# Altium PCB PCB1.PcbDoc
Units mil, origin at the board's own origin, x right, y up, seen from the top; angles counter-clockwise.
Board outline 3000.03 x 3779.56 mil, 2 copper layers (Top Layer, Bottom Layer); 116 components, 91 nets, 489 pads, 37 vias.
Unrouted connection lines stored in the file: 176.
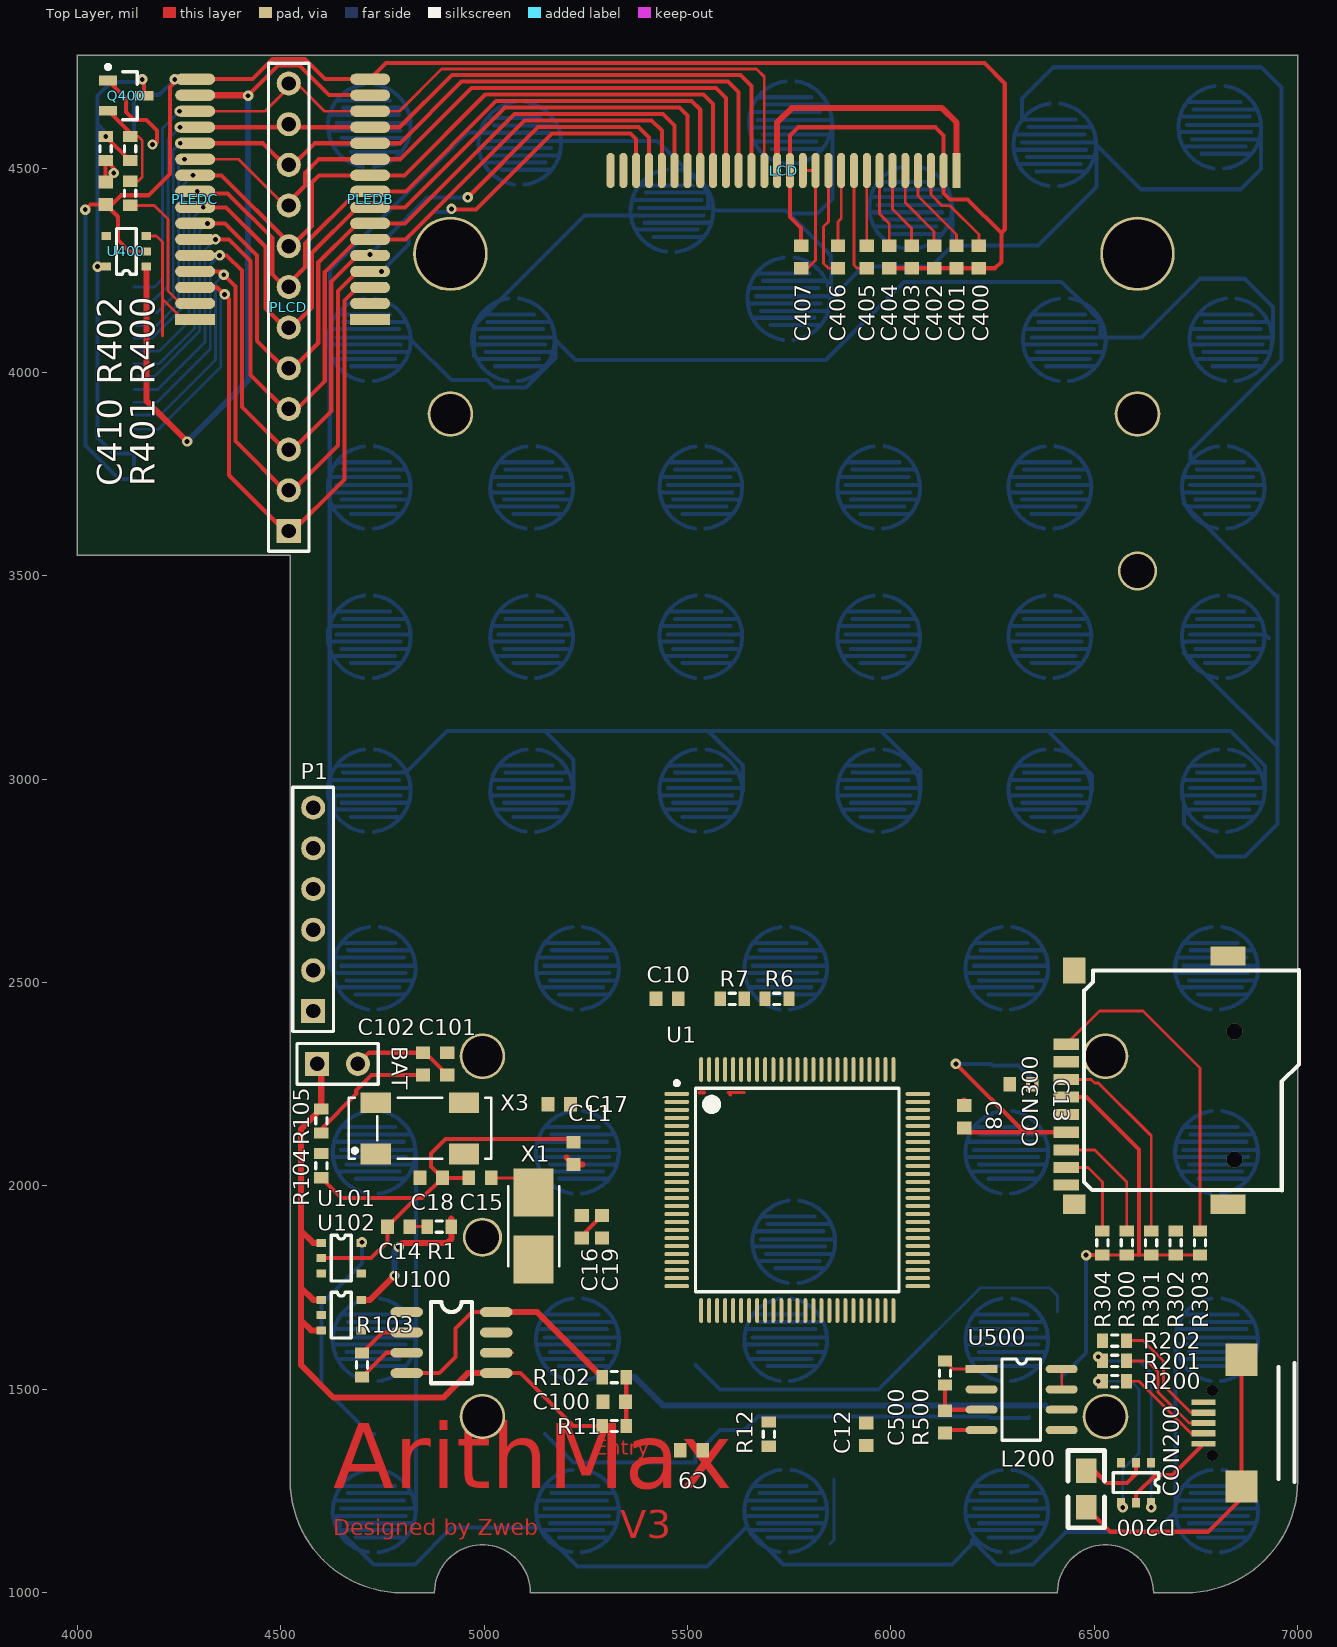
[diagram p0: Top Layer view]
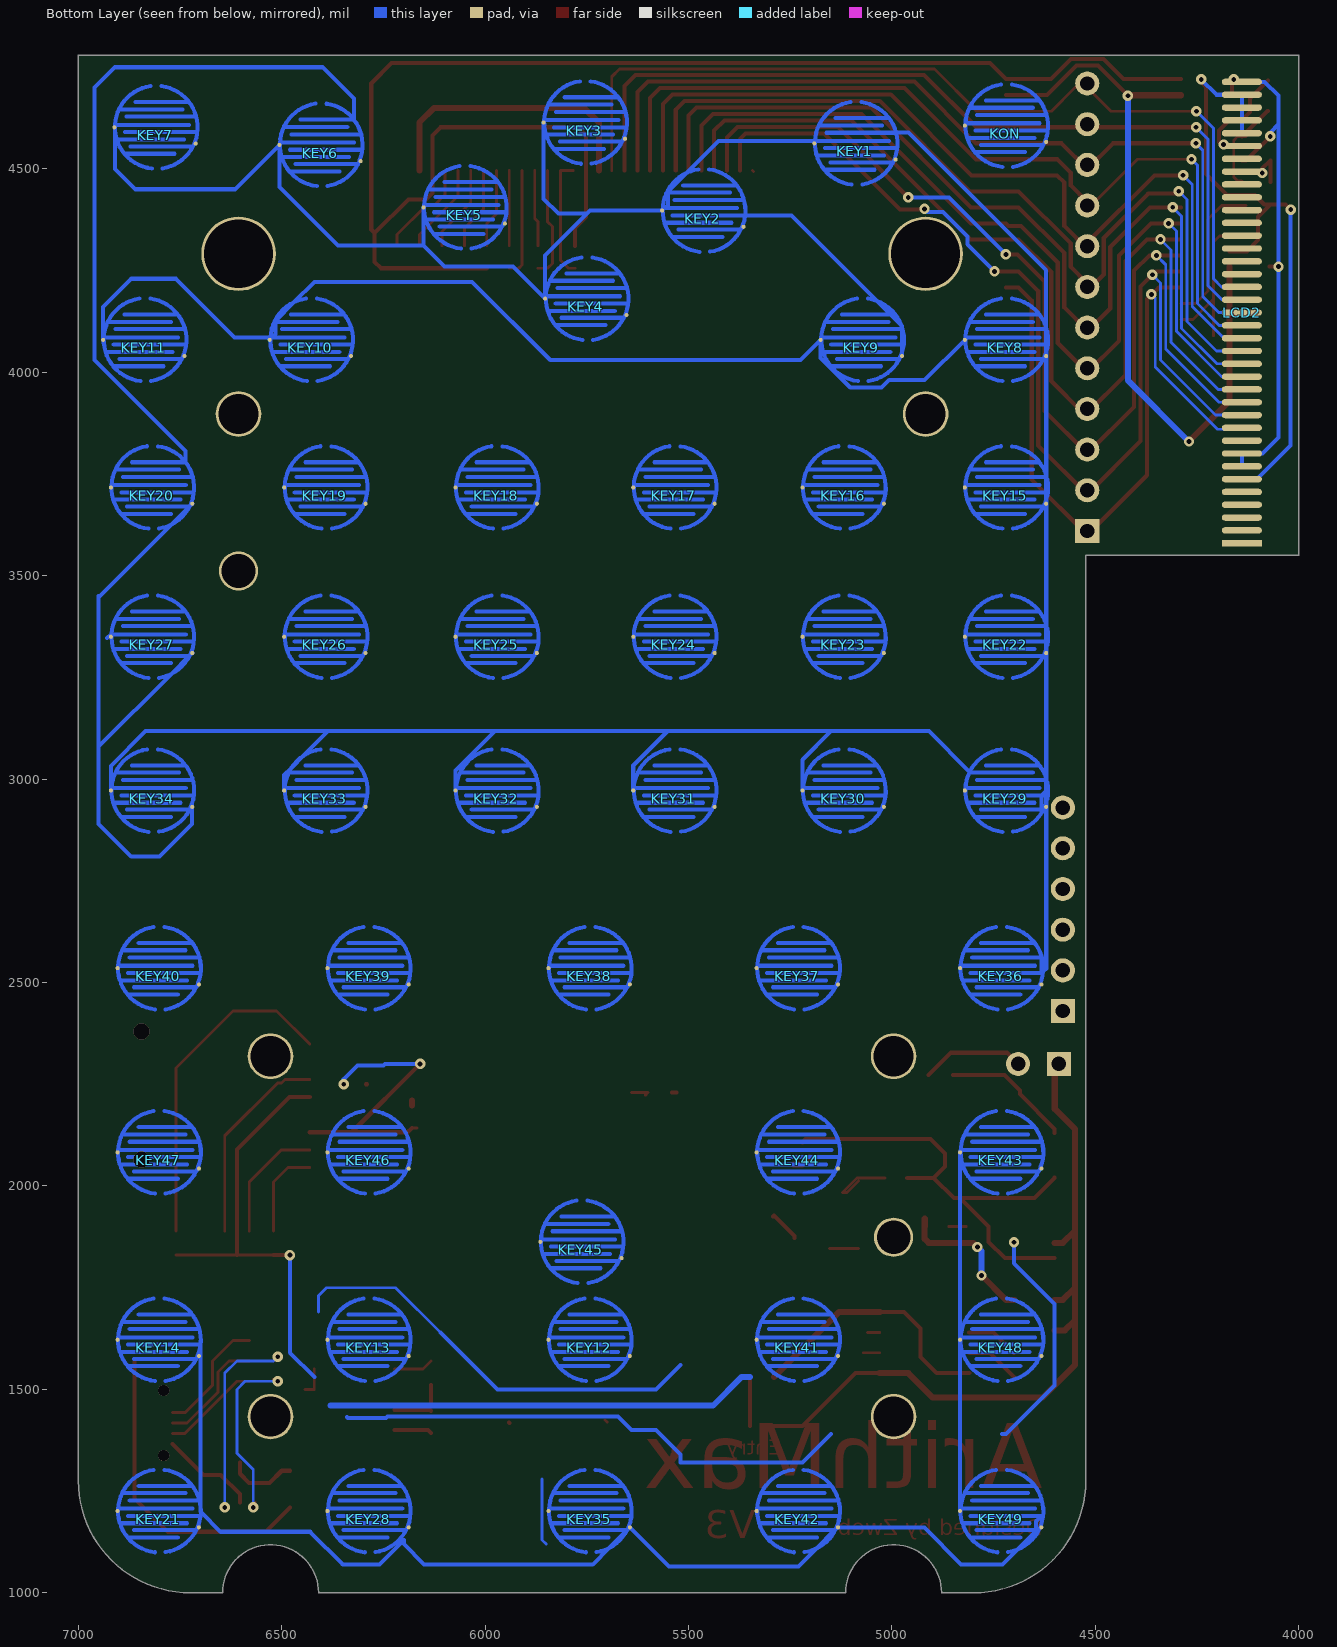
[diagram p1: Bottom Layer view, seen from below]

## Layer stack, top to bottom
Top Layer: signal copper 1.4
Dielectric: dielectric 12.6, FR-4, Dk 4.8
Bottom Layer: signal copper 1.4

## Board outline
4000,3549.99 4523.61,3549.99 4523.61,1275.59 ccw(c4799.21,1275.59) 4799.21,999.99 4877.95,999.99 ccw(c4877.95,1000) 4877.97,1000 cw(c4996.06,1000) 5114.16,1000 ccw(c5114.17,1000) 5114.17,999.99 6409.45,999.99 ccw(c6409.45,1000) 6409.46,1000 cw(c6527.56,1000) 6645.65,1000 ccw(c6645.67,1000) 6645.67,999.99 6724.41,999.99 ccw(c6724.41,1275.59) 7000.02,1275.59 7000.02,4779.53 ccw(c7000,4779.53) 7000,4779.54 4000,4779.54 ccw(c4000,4779.53) 3999.99,4779.53 3999.99,3550 ccw(c4000,3550)

## Design rules (kind name [scope] priority, off if disabled: settings)
Clearance [All] p1: gap=6
HoleSize [All] p1: absolutevalues=TRUE maxlimit=250 minlimit=11.81 maxpercent=80.000 minpercent=20.000
MinimumSolderMaskSliver [All] p1 off: minsoldermaskwidth=10
NetAntennae [All] p1 off: netantennaetolerance=0
PolygonConnect [All] p1: connectstyle=Relief reliefconductorwidth=10 reliefentries=4 polygonreliefangle="90 Angle"
RoutingVias [All] p1: holewidth=11.81 width=25.59 viastyle="Through Hole" minholewidth=11.81 minwidth=25.59 maxholewidth=11.81 maxwidth=25.59
SilkscreenOverComponentPads [All] p1: minsilkscreentomaskgap=10
SolderMaskExpansion [All] p1: expansion=4
Width [All] p1: maxlimit=20 minlimit=6 preferedwidth=7
24 further rules are at their usual default settings.

## Components (designator, comment, footprint, x,y, rotation, side; value= is the part's Value field where it differs from the comment)
BAT "Header 2" HDR1X2 4590,2300 r0 top
C8 "104" 1608[0603] 6180,2170 r270 top
C9 "104" 1608[0603] 5510,1350 r180 top
C10 "104" 1608[0603] 5450,2460 r0 top
C11 "104" 1608[0603] 5220,2080 r90 top
C12 "2.2uF" 1608[0603] 5940,1390 r270 top
C13 "2.2uF" 1608[0603] 6320,2250 r0 top
C14 "104" 1608[0603] 4790,1900 r0 top
C15 "22pF" 1608[0603] 4990,2020 r180 top
C16 "22pF" 1608[0603] 5240,1900 r270 top
C17 "12pF" 1608[0603] 5185.04,2200.79 r180 top
C18 "12pF" 1608[0603] 4870,2020 r0 top
C19 "4.7uF" 1608[0603] 5290,1900 r90 top
C100 "105" 1608[0603] 5320,1470 r0 top
C101 "105" 1608[0603] 4910,2300 r90 top
C102 "0.1uF" 1608[0603] 4850,2300 r270 top
C400 "2.2uF" 1608[0603] 6216.54,4283.46 r90 top
C401 "2.2uF" 1608[0603] 6161.42,4283.46 r90 top
C402 "2.2uF" 1608[0603] 6106.3,4283.46 r90 top
C403 "2.2uF" 1608[0603] 6051.18,4283.46 r90 top
C404 "2.2uF" 1608[0603] 5996.06,4283.46 r90 top
C405 "2.2uF" 1608[0603] 5940.94,4283.46 r90 top
C406 "0.1uF" 1608[0603] 5870.08,4283.46 r90 top
C407 "0.1uF" 1608[0603] 5779.53,4283.46 r270 top
C410 "104" 1608[0603] 4070,4440 r90 top
C500 "104" 1608[0603] 6133.15,1420 r270 top
CON200 "USB-MINIAB" USB-MICRO 6874.02,1417.32 r90 top
CON300 "TF" TF-2 6630,2260 r0 top
D200 "AZC099-04S" SOT-23-6 6640,1320 r270 top
KEY1 "Button" Button#1 5311.02,4562.99 r180 bottom
KEY2 "Button" Button#2 5685.04,4397.64 r180 bottom
KEY3 "Button" Button#3 5976.38,4614.17 r180 bottom
KEY4 "Button" Button#3 5972.44,4181.1 r180 bottom
KEY5 "Button" Button#3 6271.65,4405.51 r180 bottom
KEY6 "Button" Button#4 6625.98,4559.06 r180 bottom
KEY7 "Button" Button#1 7031.5,4602.36 r180 bottom
KEY8 "Button" Button#5 4941,4080 r180 bottom
KEY9 "Button" Button#6 5295.28,4080 r180 bottom
KEY10 "Button" Button#1 6649.61,4080 r180 bottom
KEY11 "Button" Button#3 7059.06,4080 r180 bottom
KEY12 "Button" Button#3 5964.5,1622 r180 bottom
KEY13 "Button" Button#3 6507.9,1622 r180 bottom
KEY14 "Button" Button#1 7023.6,1622 r180 bottom
KEY15 "Button" Button#5 4941,3717 r180 bottom
KEY16 "Button" Button#3 5340,3717 r180 bottom
KEY17 "Button" Button#3 5756,3717 r180 bottom
KEY18 "Button" Button#3 6193,3717 r180 bottom
KEY19 "Button" Button#4 6614,3717 r180 bottom
KEY20 "Button" Button#2 7040,3717 r180 bottom
KEY21 "Button" Button#1 7023.6,1201 r180 bottom
KEY22 "Button" Button#5 4941,3350 r180 bottom
KEY23 "Button" Button#3 5340,3350 r180 bottom
KEY24 "Button" Button#3 5756,3350 r180 bottom
KEY25 "Button" Button#3 6193,3350 r180 bottom
KEY26 "Button" Button#3 6614,3350 r180 bottom
KEY27 "Button" Button#7 7040,3350 r180 bottom
KEY28 "Button" Button#3 6507.9,1201 r180 bottom
KEY29 "Button" Button#8 4941,2972 r180 bottom
KEY30 "Button" Button#3 5340,2972 r180 bottom
KEY31 "Button" Button#3 5756,2972 r180 bottom
KEY32 "Button" Button#3 6193,2972 r180 bottom
KEY33 "Button" Button#1 6614,2972 r180 bottom
KEY34 "Button" Button#9 7040,2972 r180 bottom
KEY35 "Button" Button#1 5964.5,1201 r180 bottom
KEY36 "Button" Button#1 4952.7,2535.4 r180 bottom
KEY37 "Button" Button#10 5452.7,2535.4 r180 bottom
KEY38 "Button" Button#3 5964.5,2535.4 r180 bottom
KEY39 "Button" Button#3 6507.9,2535.4 r180 bottom
KEY40 "Button" Button#3 7023.6,2535.4 r180 bottom
KEY41 "Button" Button#3 5452.7,1622 r180 bottom
KEY42 "Button" Button#1 5452.7,1201 r180 bottom
KEY43 "Button" Button#4 4952.7,2082.7 r180 bottom
KEY44 "Button" Button#3 5452.7,2082.7 r180 bottom
KEY45 "Button" Button#3 5984.5,1862.7 r180 bottom
KEY46 "Button" Button#4 6507.9,2082.7 r180 bottom
KEY47 "Button" Button#3 7023.6,2082.7 r180 bottom
KEY48 "Button" Button#3 4952.7,1622 r180 bottom
KEY49 "Button" Button#11 4952.7,1201 r180 bottom
KON "Button" Button#3 4941,4606.3 r180 bottom
L200 "BLM21PG221SN1" 0805 6480,1210 r90 top
LCD "FPC-QSG9631" LCD_28P 6161.42,4496.06 r270 top
LCD2 "LCD_37P" LCD_37P 4140,3580 r0 bottom
P1 "Header 6" HDR1X6 4580,2430 r90 top
PLCD "Header 12" HDR1X12 4520,3610 r90 top
PLEDB "Header 16" CON_16P_1.0MM 4720,4130 r180 top
PLEDC "Header 16" CON_16P_1.0MM 4290,4130 r180 top
Q400 "PNP" SOT-23B_N 4120,4680 r0 top
R1 "10K" J1-0603 4890,1900 r0 top
R6 "NC" J1-0603 5720,2460 r0 top
R7 "10K" J1-0603 5610,2460 r0 top
R11 "NC" J1-0603 5320,1410 r0 top
R12 "0R" J1-0603 5700,1390 r270 top
R102 "0.4R" J1-0603 5320,1530 r0 top
R103 "5K" J1-0603 4700,1560 r90 top
R104 "1M" J1-0603 4600,2050 r90 top
R105 "1M" J1-0603 4600,2160 r90 top
R200 "22R" J1-0603 6550,1520 r0 top
R201 "22R" J1-0603 6550,1570 r0 top
R202 "0R" J1-0603 6550,1620 r0 top
R300 "47K" J1-0603 6580,1860 r270 top
R301 "47K" J1-0603 6640,1860 r270 top
R302 "47K" J1-0603 6700,1860 r270 top
R303 "47K" J1-0603 6760,1860 r270 top
R304 "47K" J1-0603 6520,1860 r270 top
R400 "100K" J1-0603 4130,4550 r270 top
R401 "1K" J1-0603 4130,4440 r270 top
R402 "10K" J1-0603 4070,4550 r90 top
R500 "10K" J1-0603 6133.15,1540 r270 top
U1 "STM32F407VG" 100T1_L 5770,1990 r0 top
U100 "TP4056" SO-8 4810,1690 r0 top
U101 "ME6219" SOT-23-5 4600,1860 r0 top
U102 "ME6219" SOT-23-5 4600,1720 r0 top
U400 "ME6219" SOT-23-5 4170,4260 r180 top
U500 "W25X64" SOIC8 6223.15,1550 r0 top
X1 "25MHz" 5032 5122.05,1901.57 r90 top
X3 "MC306-G-06Q-32.768 (manufacturer JFVNY)" SM8 4842.52,2141.73 r0 top

## Footprints (in the part's own frame and the unit in brackets; to place one, negate y for a bottom-side part, rotate by r counter-clockwise, add the part's x,y. Pads: shape width x height; smd on the part's side, far side on the other; paste and mask are expansions set on the pad)
100T1_L [mm] "100-Pin Thin Quad Flat Pack 0.5 mm Pitch, IPC High Density"
  oval 1.55x0.25 smd: 1(-7.525,6) 2(-7.525,5.5) 3(-7.525,5) 4(-7.525,4.5) 5(-7.525,4) 6(-7.525,3.5) 7(-7.525,3) 8(-7.525,2.5) 9(-7.525,2) 10(-7.525,1.5) 11(-7.525,1) 12(-7.525,0.5) 13(-7.525,0) 14(-7.525,-0.5) 15(-7.525,-1) 16(-7.525,-1.5) 17(-7.525,-2) 18(-7.525,-2.5) 19(-7.525,-3) 20(-7.525,-3.5) 21(-7.525,-4) 22(-7.525,-4.5) 23(-7.525,-5) 24(-7.525,-5.5) 25(-7.525,-6) 51(7.525,-6) 52(7.525,-5.5) 53(7.525,-5) 54(7.525,-4.5) 55(7.525,-4) 56(7.525,-3.5) 57(7.525,-3) 58(7.525,-2.5) 59(7.525,-2) 60(7.525,-1.5) 61(7.525,-1) 62(7.525,-0.5) 63(7.525,0) 64(7.525,0.5) 65(7.525,1) 66(7.525,1.5) 67(7.525,2) 68(7.525,2.5) 69(7.525,3) 70(7.525,3.5) 71(7.525,4) 72(7.525,4.5) 73(7.525,5) 74(7.525,5.5) 75(7.525,6)
  oval 0.25x1.55 smd: 26(-6,-7.525) 27(-5.5,-7.525) 28(-5,-7.525) 29(-4.5,-7.525) 30(-4,-7.525) 31(-3.5,-7.525) 32(-3,-7.525) 33(-2.5,-7.525) 34(-2,-7.525) 35(-1.5,-7.525) 36(-1,-7.525) 37(-0.5,-7.525) 38(0,-7.525) 39(0.5,-7.525) 40(1,-7.525) 41(1.5,-7.525) 42(2,-7.525) 43(2.5,-7.525) 44(3,-7.525) 45(3.5,-7.525) 46(4,-7.525) 47(4.5,-7.525) 48(5,-7.525) 49(5.5,-7.525) 50(6,-7.525) 76(6,7.525) 77(5.5,7.525) 78(5,7.525) 79(4.5,7.525) 80(4,7.525) 81(3.5,7.525) 82(3,7.525) 83(2.5,7.525) 84(2,7.525) 85(1.5,7.525) 86(1,7.525) 87(0.5,7.525) 88(0,7.525) 89(-0.5,7.525) 90(-1,7.525) 91(-1.5,7.525) 92(-2,7.525) 93(-2.5,7.525) 94(-3,7.525) 95(-3.5,7.525) 96(-4,7.525) 97(-4.5,7.525) 98(-5,7.525) 99(-5.5,7.525) 100(-6,7.525)
  silkscreen extent -7.65,-6.35 6.35,6.8, body extent -7,-7 7,7, height 1.05
0805 [mil]
  rect 60x50 smd: 1(0,0) 2(90,0)
  silkscreen extent -50,-45 140,45
1608[0603] [mm] "Chip Capacitor, Body 1.6x0.8mm, IPC High Density"
  rect 0.8x0.9 smd: 1(-0.7,0) 2(0.7,0)
  body extent -0.87,-0.48 0.87,0.48, height 1.3
5032 [mm]
  rect 3x2.5 smd: 1(-2.1,0) 2(2.1,0)
  silkscreen extent -2.5,-1.6 2.5,1.6
Button#1 [mil]
  round 10 smd: 1(120,0) 2(320,-40)
  Top Layer lines w10: 320.19,-12 146,-12 ; 319,26 150,26 ; 312,-47 160,-47 ; 304,6 126,6 ; 303,62 172,62 ; 291,-30 127,-30 ; 287,44 134,44 ; 268,-65 149,-65 ; 238.02,-101.12 ccw(c222.55,-0.14) 321.16,26.58 ccw(c222.55,-0.14) 235.89,101.15 ; 211.96,-101.38 cw(c223.45,0.14) 121.46,6 cw(c223.45,0.14) 208.82,101.24
Button#2 [mil]
  round 10 smd: 1(120,0) 2(320,-40)
  Top Layer lines w10: 320.19,-12 146,-12 ; 319,26 150,26 ; 312,-47 160,-47 ; 304,6 126,6 ; 303,62 172,62 ; 291,-30 127,-30 ; 287,44 134,44 ; 268,-65 149,-65 ; 238.02,-101.12 ccw(c222.55,-0.14) 323.97,-12.46 ccw(c222.55,-0.14) 235.89,101.15 ; 211.96,-101.38 cw(c223.45,0.14) 121.29,1.29 cw(c223.45,0.14) 179.94,92.57 cw(c223.45,0.14) 208.82,101.24
Button#3 [mil]
  round 10 smd: 1(120,0) 2(320,-40)
  Top Layer lines w10: 320.19,-12 146,-12 ; 319,26 150,26 ; 312,-47 160,-47 ; 304,6 126,6 ; 303,62 172,62 ; 291,-30 127,-30 ; 287,44 134,44 ; 268,-65 149,-65 ; 238.02,-101.12 ccw(c222.55,-0.14) 235.89,101.15 ; 211.96,-101.38 cw(c223.45,0.14) 208.82,101.24
Button#4 [mil]
  round 10 smd: 1(120,0) 2(320,-40)
  Top Layer lines w10: 320.19,-12 146,-12 ; 319,26 150,26 ; 312,-47 160,-47 ; 304,6 126,6 ; 303,62 172,62 ; 291,-30 127,-30 ; 287,44 134,44 ; 268,-65 149,-65 ; 238.02,-101.12 ccw(c222.55,-0.14) 303.4,62.31 ccw(c222.55,-0.14) 235.89,101.15 ; 211.96,-101.38 cw(c223.45,0.14) 208.82,101.24
Button#5 [mil]
  round 10 smd: 1(120,0) 2(320,-40)
  Top Layer lines w10: 320.19,-12 320,-12 146,-12 ; 319,26 150,26 ; 312,-47 160,-47 ; 304,6 126,6 ; 303,62 172,62 ; 291,-30 127,-30 ; 287,44 134,44 ; 268,-65 149,-65 ; 238.02,-101.12 ccw(c222.55,-0.14) 320,-30.81 ccw(c222.55,-0.14) 320.19,-30.19 ccw(c222.55,-0.14) 320,30.53 ccw(c222.55,-0.14) 235.89,101.15 ; 211.96,-101.38 cw(c223.45,0.14) 121.29,1.29 cw(c223.45,0.14) 208.82,101.24
Button#6 [mil]
  round 10 smd: 1(120,0) 2(320,-40)
  Top Layer lines w10: 320.19,-12 320,-12 146,-12 ; 319,26 150,26 ; 312,-47 160,-47 ; 304,6 126,6 ; 303,62 291.63,62 172,62 ; 291,-30 127,-30 ; 287,44 134,44 ; 268,-65 149,-65 ; 238.02,-101.12 ccw(c222.55,-0.14) 320,-30.81 ccw(c222.55,-0.14) 320,30.53 ccw(c222.55,-0.14) 318.4,35.23 ccw(c222.55,-0.14) 257.92,95.71 ccw(c222.55,-0.14) 235.89,101.15 ; 211.96,-101.38 cw(c223.45,0.14) 208.82,101.24
Button#7 [mil]
  round 10 smd: 1(120,0) 2(320,-40)
  Top Layer lines w10: 320.19,-12 146,-12 ; 319,26 150,26 ; 312,-47 160,-47 ; 304,6 126,6 ; 303,62 172,62 ; 291,-30 127,-30 ; 287,44 134,44 ; 268,-65 149,-65 ; 238.02,-101.12 ccw(c222.55,-0.14) 268.74,-91.26 ccw(c222.55,-0.14) 313.67,-46.33 ccw(c222.55,-0.14) 235.89,101.15 ; 211.96,-101.38 cw(c223.45,0.14) 121.53,7.12 cw(c223.45,0.14) 179.94,92.57 cw(c223.45,0.14) 208.82,101.24
Button#8 [mil]
  round 10 smd: 1(120,0) 2(320,-40)
  Top Layer lines w10: 320.19,-12 308.63,-12 146,-12 ; 319,26 150,26 ; 312,-47 308.49,-47 160,-47 ; 304,6 126,6 ; 303,62 172,62 ; 291,-30 127,-30 ; 287,44 134,44 ; 268,-65 149,-65 ; 238.02,-101.12 ccw(c222.55,-0.14) 308.49,-55.37 ccw(c222.55,-0.14) 320.19,-30.19 ccw(c222.55,-0.14) 320.19,29.92 ccw(c222.55,-0.14) 320,30.53 ccw(c222.55,-0.14) 235.89,101.15 ; 211.96,-101.38 cw(c223.45,0.14) 132.11,45.89 cw(c223.45,0.14) 208.82,101.24
Button#9 [mil]
  round 10 smd: 1(120,0) 2(320,-40)
  Top Layer lines w10: 320.19,-12 319.65,-12 146,-12 ; 319,26 150,26 ; 312,-47 160,-47 ; 304,6 126,6 ; 303,62 172,62 ; 291,-30 127,-30 ; 287,44 134,44 ; 268,-65 149,-65 ; 238.02,-101.12 ccw(c222.55,-0.14) 319.65,-31.89 ccw(c222.55,-0.14) 235.89,101.15 ; 211.96,-101.38 cw(c223.45,0.14) 208.82,101.24
Button#10 [mil]
  round 10 smd: 1(120,0) 2(320,-40)
  Top Layer lines w10: 320.19,-12 146,-12 ; 319,26 150,26 ; 312,-47 160,-47 ; 304,6 126,6 ; 303,62 172,62 ; 291,-30 162.7,-30 127,-30 ; 287,44 134,44 ; 268,-65 162.7,-65 149,-65 ; 238.02,-101.12 ccw(c222.55,-0.14) 235.89,101.15 ; 211.96,-101.38 cw(c223.45,0.14) 126,30.81 cw(c223.45,0.14) 208.82,101.24
Button#11 [mil]
  round 10 smd: 1(120,0) 2(320,-40)
  Top Layer lines w10: 320.19,-12 146,-12 ; 319,26 150,26 ; 312,-47 307,-47 160,-47 ; 304,6 126,6 ; 303,62 172,62 ; 291,-30 127,-30 ; 287,44 134,44 ; 268,-65 149,-65 ; 238.02,-101.12 ccw(c222.55,-0.14) 260.73,-94.89 ccw(c222.55,-0.14) 235.89,101.15 ; 211.96,-101.38 cw(c223.45,0.14) 208.82,101.24
CON_16P_1.0MM [mm]
  rect 2.5x0.7 smd: 1(0,0)
  oval 2.5x0.7 smd: 2(0,-1) 3(0,-2) 4(0,-3) 5(0,-4) 6(0,-5) 7(0,-6) 8(0,-7) 9(0,-8) 10(0,-9) 11(0,-10) 12(0,-11) 13(0,-12) 14(0,-13) 15(0,-14) 16(0,-15)
HDR1X2 [mm] "Connector; Header; 2 Position"
  rect 1.5x1.5 hole 0.9: 1(0,0)
  round 1.5 hole 0.9: 2(2.54,0)
  silkscreen extent -1.27,-1.27 3.81,1.27
HDR1X6 [mm] "Connector; Header; 6 Position"
  rect 1.5x1.5 hole 0.9: 1(0,0)
  round 1.5 hole 0.9: 2(2.54,0) 3(5.08,0) 4(7.62,0) 5(10.16,0) 6(12.7,0)
  silkscreen extent -1.27,-1.27 13.97,1.27
HDR1X12 [mm] "Connector; Header; 12 Position"
  rect 1.5x1.5 hole 0.9: 1(0,0)
  round 1.5 hole 0.9: 2(2.54,0) 3(5.08,0) 4(7.62,0) 5(10.16,0) 6(12.7,0) 7(15.24,0) 8(17.78,0) 9(20.32,0) 10(22.86,0) 11(25.4,0) 12(27.94,0)
  silkscreen extent -1.27,-1.27 29.21,1.27
J1-0603 [mm] "Chip Resistor, Body 1.6x0.8mm, IPC High Density"
  rect 0.7x0.9 smd: 1(-0.75,0) 2(0.75,0)
  silkscreen extent -0.2,-0.35 0.2,0.35, body extent -0.85,-0.48 0.85,0.48, height 0.9
LCD_28P [mm]
  rect 2.2x0.5 smd: 1(0,0)
  oval 2.2x0.5 smd: 2(0,-0.8) 3(0,-1.6) 4(0,-2.4) 5(0,-3.2) 6(0,-4) 7(0,-4.8) 8(0,-5.6) 9(0,-6.4) 10(0,-7.2) 11(0,-8) 12(0,-8.8) 13(0,-9.6) 14(0,-10.4) 15(0,-11.2) 16(0,-12) 17(0,-12.8) 18(0,-13.6) 19(0,-14.4) 20(0,-15.2) 21(0,-16) 22(0,-16.8) 23(0,-17.6) 24(0,-18.4) 25(0,-19.2) 26(0,-20) 27(0,-20.8) 28(0,-21.6)
LCD_37P [mm]
  rect 2.5x0.4 smd: 1(0,0)
  oval 2.5x0.4 smd: 2(0,-0.8) 3(0,-1.6) 4(0,-2.4) 5(0,-3.2) 6(0,-4) 7(0,-4.8) 8(0,-5.6) 9(0,-6.4) 10(0,-7.2) 11(0,-8) 12(0,-8.8) 13(0,-9.6) 14(0,-10.4) 15(0,-11.2) 16(0,-12) 17(0,-12.8) 18(0,-13.6) 19(0,-14.4) 20(0,-15.2) 21(0,-16) 22(0,-16.8) 23(0,-17.6) 24(0,-18.4) 25(0,-19.2) 26(0,-20) 27(0,-20.8) 28(0,-21.6) 29(0,-22.4) 30(0,-23.2) 31(0,-24) 32(0,-24.8) 33(0,-25.6) 34(0,-26.4) 35(0,-27.2) 36(0,-28) 37(0,-28.8)
SM8 [mm]
  rect 1.9x1.3 smd: 1(-2.75,-1.6) 2(2.75,-1.6) 3(2.75,1.6) 4(-2.75,1.6)
  silkscreen extent -4.44,-1.91 4.44,1.91
SO-8 [mil]
  oval 80x24 smd: 1(0,0) 2(0,-50) 3(0,-100) 4(0,-150) 5(220,-150) 6(220,-100) 7(220,-50) 8(220,0)
  silkscreen extent 60,-175 160,25
SOIC8 [mm]
  rect 2x0.5 smd: 1(0,0)
  oval 2x0.5 smd: 2(0,-1.27) 3(0,-2.54) 4(0,-3.81) 5(5,-3.81) 6(5,-2.54) 7(5,-1.27) 8(5,0)
  silkscreen extent 1.27,-4.44 3.68,0.64
SOT-23-5 [mm]
  rect 0.6x0.5 smd: 1(0,0) 2(0,-0.95) 3(0,-1.9) 4(2.5,-1.9) 5(2.5,0)
  silkscreen extent 0.63,-2.38 1.87,0.48
SOT-23-6 [mm]
  rect 0.6x0.5 smd: 1(0,0) 2(0,-0.95) 3(0,-1.9) 4(2.5,-1.9) 5(2.5,-0.95) 6(2.5,0)
  silkscreen extent 0.63,-2.38 1.87,0.48
SOT-23B_N [mm] "SOT23, 3-Leads, Body 2.9x1.3mm, Pitch 0.95mm, Lead Span 2.4mm, IPC Medium Density"
  rect 1.15x0.6 smd: 1(-1.125,0.95) 2(-1.125,-0.95) 3(1.125,0)
  silkscreen extent -1.25,-1.5 0.7,1.92, body extent -0.7,-1.5 0.7,1.5, height 1.14
TF-2 [mm]
  rect 1.4x1.2 smd: 0(-4.55,-7.75)
  rect 1.4x1.6 smd: 0(-4.55,6.85)
  rect 2.2x1.2 smd: 0(5.05,-7.75) 0(5.05,7.75)
  rect 1.6x0.7 smd: 1(-5.05,2.25) 2(-5.05,1.15) 3(-5.05,0.05) 4(-5.05,-1.05) 5(-5.05,-2.15) 6(-5.05,-3.25) 7(-5.05,-4.35) 8(-5.05,-5.45) 9(-5.05,-6.55)
  silkscreen extent -3.94,-6.88 9.47,6.86
USB-MICRO [mm]
  rect 0.35x1.5 smd: 1(-1.3,2.675) 5(1.3,2.675)
  rect 0.4x1.5 smd: 2(-0.65,2.675) 3(0,2.675) 4(0.65,2.675)
  round 0.7 hole 0.7 unplated: 6(-2.032,2.134) 7(2.032,2.134)
  rect 2x2 smd: 8(-3.95,0.3) 9(3.95,0.3)
  silkscreen extent -3.68,-3 3.75,-2

## Part data
BAT: "Header, 2-Pin"
C8 C9 C10 C11 C12 C13 C14 C15 C16 C17 C18 C100 C101 C102 C400 C401 C402 C403 C404 C405 C406 C407 C410 C500: library part "Cap Semi", "Capacitor (Semiconductor SIM Model)"
C19: library part EC
L200: library part BEAD__FERRITE, "EMI Suppression Filters,2A,0805"
P1: "Header, 6-Pin"
PLCD: "Header, 12-Pin"
PLEDB PLEDC: "Header, 16-Pin"
Q400: "PNP Bipolar Transistor"
R1 R6 R7 R11 R12 R102 R103 R104 R105 R200 R201 R202 R300 R301 R302 R303 R304 R400 R401 R402 R500: library part Res3, "Resistor"
U1: "ARM Cortex-M3 Microcontroller"
U500: library part W25X16
X1: library part CRY
X3: library part MC306

## Free pads (board coordinates)
  round 112.2 hole 98.43: 0(4917.32,3897.64) 0(4996.06,1433.07) 0(4996.06,2318.9) 0(6527.56,1433.07) 0(6527.56,2318.9) 0(6606.3,3897.64)
  round 183.07 hole 169.29: 0(4917.32,4291.34) 0(6606.3,4291.34)
  round 96.46 hole 82.68: 0(4996.06,1874.02) 0(6606.3,3511.81)

## Via types
v1: diameter 25.59, hole 11.81, Top Layer to Bottom Layer, 35 vias
v2: diameter 39.37, hole 39.37, Top Layer to Bottom Layer, 2 vias

## Nets (pads, with @x,y where several pads share a name; then routed paths per layer and width w, separated by ;. In a path a pad name is that pad's centre, name@x,y a point inside that pad or via, vN(x,y) a via of type N, cw(c..) or ccw(c..) an arc to the next point about the centre after c; other vN are vias at no path point)
ADC12_IN8: C102.2 R104.2 R105.1 U1.35 | length 319.7
  Top Layer w10: R105.1 4600,2140 4685.85,2225.85 4685.85,2234.87 4723.42,2272.44 C102.2
BOOT0: R6.1 R7.2 U1.94 | length 51
  Top Layer w7: 5606.61,2222.91 5599.53,2230 5640.47,2230
BOOT1: R12.1 U1.37 | length 7.1
  Top Layer w7: R12.1 R12.1@5705.04,1424.57
CHRG: U1.42 U100.7 | length 30
  Top Layer w7: U100.7 U100.7@5060,1640
FSMC_A16: LCD2.11 LCD.26 PLCD.2 PLEDB.4 PLEDC.4 U1.58 | length 2692.7
  Top Layer w10: PLEDC.4 4351.89,4248.11 v1(4360,4240) 4388.96,4211.04 4388.96,3831.04 4520,3700 4640.53,3820.53 4640.53,4199.74 4688.89,4248.11 PLEDB.4 v1(4748.11,4248.11) ; v1(4920,4401.67) 4921.67,4400 4980,4400 5167,4587 5360,4587 5374.01,4572.99 LCD.26
  Bottom Layer w7: LCD2.11 4204.96,3894.96 4340,4030 4340,4220 v1(4360,4240)
  Bottom Layer w10: v1(4748.11,4248.11) 4814.79,4314.79 4814.79,4333.81 4874.85,4393.87 4912.2,4393.87 v1(4920,4401.67)
FSMC_D0: LCD2.14 LCD.23 PLCD.5 PLEDB.7 PLEDC.7 U1.61 | length 2424.7
  Top Layer w10: PLEDC.7 v1(4320,4366.22) 4363.78,4366.22 4442.44,4287.56 4442.44,4077.56 4520,4000 4592.53,4072.53 4592.53,4269.85 4682.67,4360 4713.78,4360 PLEDB.7 4806.22,4366.22 5075,4635 5440,4635 5468.5,4606.5 LCD.23
  Bottom Layer w7: LCD2.14@4149.45,3990 4190,3990 4301,4101 4301,4347.22 v1(4320,4366.22)
FSMC_D1: LCD2.15 LCD.22 PLCD.6 PLEDB.8 PLEDC.8 U1.62 | length 2367.4
  Top Layer w10: PLEDC.8 v1(4310,4405.59) 4365.59,4405.59 4463.47,4307.71 4463.47,4156.53 4520,4100 4520,4102.94 4576.53,4159.47 4576.53,4293.22 4688.89,4405.59 PLEDB.8 4805.59,4405.59 5051,4651 5480,4651 5500,4631 LCD.22
  Bottom Layer w7: LCD2.15 4200.95,4020.95 4288,4108 4288,4383.59 v1(4310,4405.59)
FSMC_D2: LCD2.16 LCD.21 PLCD.7 PLEDB.9 PLEDC.9 U1.81 | length 2290.3
  Top Layer w10: v1(4294.96,4444.96) PLEDC.9 4294.96,4440 4370,4440 4479.47,4330.53 4479.47,4240.53 4520,4200 4520,4218.94 4560.53,4259.47 4560.53,4316.59 4688.89,4444.96 PLEDB.9 4807.96,4444.96 5030,4667 5510,4667 5531.5,4645.5 LCD.21
  Bottom Layer w7: LCD2.16 4202.44,4052.44 4275,4125 4275,4425 v1(4294.96,4444.96)
FSMC_D3: LCD2.17 LCD.20 PLCD.8 PLEDB.10 PLEDC.10 U1.82 | length 2245.6
  Top Layer w10: v1(4284.33,4484.33) PLEDC.10 4354.61,4484.33 4520,4318.94 PLCD.8@4520,4302.94 ; PLCD.8@4520,4300 PLCD.8@4520,4302.94 ; LCD.20 5562.99,4660.01 5540,4683 5003,4683 4804.33,4484.33 PLEDB.10 4594.33,4484.33 4576.53,4466.53 4576.53,4359.47 PLCD.8@4520,4302.94
  Bottom Layer w7: LCD2.17 4183.94,4083.94 4262,4162 4262,4462 v1(4284.33,4484.33)
FSMC_D4: LCD2.18 LCD.19 PLCD.9 PLEDB.11 PLEDC.11 U1.38 | length 2215.7
  Top Layer w7: v1(4263.7,4523.7) PLEDC.11 4396.3,4523.7 PLCD.9@4520,4400
  Top Layer w10: PLCD.9@4520,4400 4520,4418.94 4560.53,4459.47 4560.53,4490.53 4593.7,4523.7 PLEDB.11 4793.7,4523.7 4969,4699 5570,4699 5594.49,4674.51 LCD.19
  Bottom Layer w7: LCD2.18 4195.43,4115.43 4249,4169 4249,4509 v1(4263.7,4523.7)
FSMC_D5: LCD2.19 LCD.18 PLCD.10 PLEDB.12 PLEDC.12 U1.39 | length 2188.1
  Top Layer w10: v1(4253.07,4563.07) PLEDC.12 4456.93,4563.07 4520,4500 4583.07,4563.07 PLEDB.12 4793.07,4563.07 4945,4715 5600,4715 5625.98,4689.02 LCD.18
  Bottom Layer w7: LCD2.19 4196.93,4146.93 4236,4186 4236,4546 v1(4253.07,4563.07)
FSMC_D6: LCD2.20 LCD.17 PLCD.11 PLEDB.13 PLEDC.13 U1.40 | length 2178.1
  Top Layer w10: v1(4252.44,4602.44) PLEDC.13 4517.56,4602.44 4520,4600 4522.44,4602.44 PLEDB.13 4792.44,4602.44 4921,4731 5630,4731 5657.48,4703.52 LCD.17
  Bottom Layer w7: LCD2.20 4188.43,4178.43 4223,4213 4223,4573 v1(4252.44,4602.44)
FSMC_D7: LCD2.21 LCD.16 PLCD.12 PLEDB.14 PLEDC.14 U1.41 | length 2274.1
  Top Layer w7: v1(4251.81,4641.81) PLEDC.14 4461.81,4641.81 4520,4700 4550,4700 4608.19,4641.81 PLEDB.14 4791.81,4641.81 4895.5,4745.5 5670,4745.5 5688.98,4726.52 LCD.16
  Bottom Layer w7: LCD2.21 4189.92,4209.92 4210,4230 4210,4600 v1(4251.81,4641.81)
FSMC_NE1: LCD2.10 LCD.28 PLCD.1 PLEDB.3 PLEDC.3 U1.88 | length 1906.5
  Top Layer w10: PLEDC.3 4344.22,4208.74 v1@4362.3,4190.67 ; v1(4362.3,4191.48) v1@4362.3,4190.67 ; PLEDB.3 4688.89,4208.74 4656.53,4176.37 4656.53,3736.53 4520,3600 4372.96,3747.04 4372.96,4180 v1@4362.3,4190.67
  Bottom Layer w7: LCD2.10 4143.46,3860 4200,3860 4353,4013 4353,4182.19 v1(4362.3,4191.48)
FSMC_NOE: LCD2.13 LCD.24 PLCD.4 PLEDB.6 PLEDC.6 U1.85 | length 2537.5
  Top Layer w10: PLEDC.6 v1(4340,4326.85) 4373.15,4326.85 4426.44,4273.56 4426.44,3993.56 4520,3900 4530,3900 4608.53,3978.53 4608.53,4246.48 4688.89,4326.85 PLEDB.6 4806.85,4326.85 5099,4619 5412.06,4619 5437.01,4594.06 LCD.24
  Bottom Layer w7: LCD2.13 4197.95,3957.95 4314,4074 4314,4300.85 v1(4340,4326.85) v1@4340,4326
FSMC_NWE: LCD2.12 LCD.25 PLCD.3 PLEDB.5 PLEDC.5 U1.86 | length 2606
  Top Layer w10: PLEDC.5 v1(4350,4287.48) 4367.48,4287.48 4404.96,4250 4404.96,3915.04 4520,3800 4624.53,3904.53 4624.53,4223.11 4691.41,4290 v1(4720,4290) ; v1(4960,4430) 5133,4603 5380,4603 5405.51,4577.49 LCD.25
  Bottom Layer w7: LCD2.12 4196.46,3926.46 4327,4057 4327,4264.48 v1(4350,4287.48)
  Bottom Layer w10: v1(4720,4290) 4860,4430 v1(4960,4430)
GND: BAT.2 C8.2 C9.2 C10.2 C11.2 C12.2 C13.2 C14.1 C15.2 C16.2 C17.2 C18.2 C19.2 C100.1 C101.1 C102.1 C400.1 C401.1 C402.1 C403.1 C404.1 C407.1 C410.1 C500.2 CON200.5 CON300.6 D200.2 L200.2 LCD2.6 LCD2.31 LCD2.33 LCD2.34 LCD2.35 LCD2.36 LCD.2 LCD.14 P1.4 PLEDB.16 PLEDC.16 R7.1 R12.2 R103.1 R104.1 U1.10 U1.20 U1.27 U1.74 U1.99 U100.1 U100.3 U101.2 U102.2 U400.2 U500.4 | length 8024.2
  Top Layer w7: C8.2@6167.56,2142.44 C8.2
  Top Layer w10: v1(4020,4400) 4032.44,4412.44 C410.1 ; U400.2 4127.4,4297.4 4100,4324.8 4100,4382.44 C410.1 ; v1(4240,4720) 4240,4713.64 4228.02,4701.66 4228.02,4488.02 4175.25,4435.25 4107.73,4435.25 4084.92,4412.44 C410.1 ; PLEDC.16 4430.55,4720.55 4480,4770 4560,4770 4609.45,4720.55 PLEDB.16 4759.45,4760 6230,4760 6280,4710 6280,4350.87 6271.65,4342.52 ; U101.2 4722.6,1822.6 4762.44,1862.44 C14.1 4832.44,1970 ; R104.1 4600,2020 4650,1970 4832.44,1970 ; BAT.2 4717.56,2327.56 C102.1 4854.88,2327.56 C101.1 ; R103.1 4759.53,1590 U100.3 ; C15.2 C18.2 ; C11.2 5212.23,2115.33 4905.33,2115.33 4870,2080 4870,2047.56 C18.2 ; C16.2 5240,1877.56 C19.2 C19.2@5292.36,1925.2 ; 5530,2230 5540.47,2230 ; C407.1 5779.53,4354.33 5751.97,4381.89 LCD.14 5751.97,4582.68 5771.65,4602.36 6110.24,4602.36 6129.92,4582.68 LCD.2 6129.92,4440.94 6145.67,4425.2 6188.98,4425.2 6271.65,4342.52 ; C404.1 C403.1 C402.1 C401.1 C400.1 6255.91,4255.91 6271.65,4271.65 6271.65,4342.52 ; C500.2 6140.71,1400 U500.4 ; v1(6160,2300) 6327.95,2132.05 ; C8.2 6190.39,2132.05 6327.95,2132.05 ; CON300.6 6327.95,2132.05 ; L200.2 6500,1300 6530,1270 6580,1270 6602.6,1292.6 D200.2 ; 4832.44,1970 4847.56,1970 C18.2
  Bottom Layer w10: v1(4020,4400) 4020,3820 4102.52,3737.48 LCD2.6 ; LCD2.33 LCD2.34 LCD2.35 LCD2.36 4202.36,4682.36 v1(4240,4720) ; v1(6160,2300) 6246.35,2300 6250.14,2296.2 6313.8,2296.2 6347.56,2262.44 v1(6347.56,2250)
I2C1_SCL: U1.95
I2C1_SDA: U1.96
KI_0: KEY1.2 KEY8.2 KEY15.2 KEY22.2 KEY29.2 KEY36.2 KEY43.2 U1.24 | length 3439.6
  Bottom Layer w10: 4620.81,4068 4620.81,4049.81 4620.81,3746.92 4620.81,3705 4620.81,3686.81 4620.81,3379.92 4620.81,3338 4620.81,3319.81 4620.81,3001.92 4620.81,2960 4620.81,2941.81 4620.81,2535.1 4628.27,2527.64 4632.51,2523.4 4632.51,2565.32 ; 4632.51,2916.63 4632.51,2925 4632.51,2959.86 4632.37,2960 4621,2971.37 4621,3002.53 KEY22.2 4621,3319.19 4621,3338 4621,3380.53 KEY15.2 4621,3686.19 4621,3705 4621,3747.53 KEY8.2 4621,4049.19 4621,4068 4621,4110.53 4621,4251 4959.58,4589.58 4989.87,4589.58
KI_1: KEY2.2 KEY9.2 KEY16.2 KEY23.2 KEY30.2 KEY37.2 KEY44.2 U1.25 | length 571.9
  Bottom Layer w10: KEY9.2 4975.28,4049.19 4975.28,4068 4975.28,4110.53 4975.28,4113.63 4976.88,4115.23 5003.65,4142 5037.36,4175.71 5246.83,4385.18 5361.07,4385.18
KI_2: KEY3.2 KEY10.2 KEY17.2 KEY24.2 KEY31.2 KEY38.2 KEY45.2 U1.26
KI_3: KEY4.2 KEY11.2 KEY18.2 KEY25.2 KEY32.2 KEY39.2 KEY46.2 U1.29
KI_4: KEY5.2 KEY12.2 KEY19.2 KEY26.2 KEY33.2 KEY40.2 KEY47.2 U1.30
KI_5: KEY6.2 KEY13.2 KEY20.2 KEY27.2 KEY34.2 KEY41.2 KEY48.2 U1.31 | length 3310.3
  Bottom Layer w10: 6322.58,4621.37 6322.58,4672.58 6400,4750 6910,4750 6960,4700 6960,4030 6737,3807 6737,3779.83 6737,3779 ; KEY27.2 6726.33,3303.67 6771.26,3258.74 6950,3080 ; KEY20.2 6726.33,3670.67 6771.26,3625.74 6947,3450 6950,3450 6950,3080 ; 6720.35,2940.11 6720.35,2889.65 6800,2810 6870,2810 6950,2890 6950,3080
KI_6: KEY7.2 KEY14.2 KEY21.2 KEY28.2 KEY35.2 KEY42.2 KEY49.2 U1.32 | length 2814.1
  Bottom Layer w10: 4632.51,1189 4645.7,1175.81 4645.7,1154 4645.7,1152.37 4691.97,1106.11 4728.07,1070 4830,1070 4920,1160 5134.7,1160 5138.05,1156.65 5140.7,1154 5185.93,1108.77 5230,1064.7 5548.2,1064.7 KEY35.2 5650.83,1154.67 5695.76,1109.74 5735.5,1070 6150,1070 6200,1120 6200,1130 6260,1070 6350,1070 6430,1150 6650,1150 6698.91,1198.91 6699.3,1199.3 6699.3,1210.06 6699.3,1612.67 6699.3,1619.58 6698.9,1619.98
KO_0: KEY1.1 KEY2.1 KEY3.1 KEY4.1 KEY5.1 KEY6.1 KEY7.1 U1.97 | length 2761.7
  Bottom Layer w10: 5185.02,4568.99 5189.57,4568.99 5426.31,4568.99 5505.1,4490.21 5551.04,4444.27 5551.04,4441.64 5551.04,4411.64 5559.04,4403.64 5563.75,4398.93 KEY2.1 5742.36,4397.64 5750,4390 ; KEY3.1 5856.38,4426.38 5820,4390 5750,4390 ; KEY5.1 6151.65,4311.65 ; 6910.02,4608.63 6910.02,4596.36 6910.02,4500.02 6860,4450 6615.04,4450 KEY6.1 6505.98,4455.98 6361.65,4311.65 6151.65,4311.65 ; 5750,4390 5852.44,4287.56 KEY4.1 5931.34,4260 6100,4260 6151.65,4311.65
KO_1: KEY8.1 KEY9.1 KEY10.1 KEY11.1 KEY12.1 KEY13.1 KEY14.1 U1.98 | length 2595.1
  Bottom Layer w10: 4815,4086 4819.71,4081.29 KEY8.1 4919.86,3981.14 5006.76,3981.14 5025.33,3962.57 5102.57,3962.57 5175.28,4035.28 KEY9.1 5225.28,4030 5840,4030 6032.23,4222.23 6420,4222.23 6469.66,4172.57 6515.61,4126.63 6515.61,4124 6515.61,4094 6523.61,4086 6528.15,4086 6616,4086 6760,4230 6870,4230 6939.06,4160.94 KEY11.1
KO_2: KEY15.1 KEY16.1 KEY17.1 KEY18.1 KEY19.1 KEY20.1 KEY21.1 U1.1
KO_3: KEY22.1 KEY23.1 KEY24.1 KEY25.1 KEY26.1 KEY27.1 KEY28.1 U1.2 | length 15.1
  Bottom Layer w10: 6918.47,3357.12 6929.13,3346.46
KO_4: KEY29.1 KEY30.1 KEY31.1 KEY32.1 KEY33.1 KEY34.1 KEY35.1 U1.3 | length 2985
  Bottom Layer w10: 4807,3016 4808.89,3017.89 4909.11,3118.11 5149.61,3118.11 ; KEY30.1 5220,3047.72 5149.61,3118.11 ; KEY31.1 5636,3033.29 5551.18,3118.11 ; KEY32.1 6073,3021.49 5976.38,3118.11 ; KEY33.1 6494,3009.94 6476.36,3027.58 6445.99,3057.95 6385.83,3118.11 ; KEY34.1 6920,3032.76 6834.65,3118.11 6385.83,3118.11 ; 5149.61,3118.11 5551.18,3118.11 ; 5551.18,3118.11 5976.38,3118.11 ; 5976.38,3118.11 6385.83,3118.11
KO_5: KEY36.1 KEY37.1 KEY38.1 KEY39.1 KEY40.1 KEY41.1 KEY42.1 U1.4
KO_6: KEY43.1 KEY44.1 KEY45.1 KEY46.1 KEY47.1 KEY48.1 KEY49.1 U1.5 | length 890.2
  Bottom Layer w10: 4826.7,2088.7 4831.41,2083.99 KEY43.1 KEY48.1 KEY49.1
LCD_RST: LCD.27 U1.18 | length 3.6
  Top Layer w7: LCD.27@5340,4493.54 LCD.27
NetC12_1: C12.1 U1.49 | length 1.8
  Top Layer w10: C12.1 C12.1@5941.26,1418.82
NetC13_1: C13.1 U1.73 | length 2.4
  Top Layer w10: C13.1@6290,2250 C13.1
NetC400_2: C400.2 LCD.3 | length 245.5
  Top Layer w7: LCD.3 6098.43,4437.01 6125.98,4409.45 6145.67,4409.45 6216.54,4338.58 C400.2
NetC401_2: C401.2 LCD.4 | length 224.2
  Top Layer w7: LCD.4 6066.93,4433.07 6161.42,4338.58 C401.2
NetC402_2: C402.2 LCD.5 | length 214.4
  Top Layer w7: LCD.5 6035.43,4417.32 6106.3,4346.46 C402.2
NetC403_2: C403.2 LCD.6 | length 204.6
  Top Layer w7: LCD.6 6003.94,4401.57 6051.18,4354.33 C403.2
NetC404_2: C404.2 LCD.7 | length 194.8
  Top Layer w7: LCD.7 5972.44,4389.76 5996.06,4366.14 C404.2
NetC405_1: C405.1 LCD.9 | length 267
  Top Layer w7: LCD.9 5909.45,4263.78 5917.32,4255.91 C405.1
NetC405_2: C405.2 LCD.8 | length 185
  Top Layer w7: C405.2 LCD.8
NetC406_1: C406.1 LCD.11 | length 273.6
  Top Layer w7: LCD.11 5846.46,4370.08 5834.65,4358.27 5834.65,4267.72 5846.46,4255.91 C406.1
NetC406_2: C406.2 LCD.10 | length 188.3
  Top Layer w7: C406.2 5870.08,4370.08 5877.95,4377.95 LCD.10
NetC407_2: C407.2 LCD.12 LCD.13 | length 295.6
  Top Layer w7: C407.2 5795.28,4255.91 5814.96,4275.59 LCD.12 LCD.13
NetC410_2: C410.2 LCD2.30 R402.1 | length 91.7
  Top Layer w10: C410.2 R402.1 4090,4500.47 v1(4090,4490)
NetCON200_2: CON200.2 R200.2 | length 242.3
  Top Layer w7: R200.2 6610,1520 6738.27,1391.73 CON200.2
NetCON200_3: CON200.3 R201.2 | length 281.7
  Top Layer w7: R201.2 6630,1570 6657,1543 6657,1493 6732.68,1417.32 CON200.3
NetCON200_4: CON200.4 R202.2 | length 297.7
  Top Layer w7: R202.2 6620,1620 6670,1570 6670,1510 6737.09,1442.91 CON200.4
NetCON200_8: CON200.8 CON200.9 L200.1 | length 781.7
  Top Layer w10: L200.1 6540,1150 6780,1150 6862.2,1232.2 CON200.8 CON200.9
NetQ400_2: Q400.2 R400.1 R401.1 | length 238.7
  Top Layer w7: R400.1 4140,4579.53 4150.47,4579.53 4160,4570 4160,4480 4150,4470 4140.47,4470 R401.1@4140,4469.53
  Top Layer w10: Q400.2 4076.93,4642.6 R400.1@4140,4579.53
NetR102_1: R102.1 U100.4 U100.8 | length 649.9
  Top Layer w10: U100.4 4890,1540 4930,1580 4930,1650 4970,1690 U100.8
  Top Layer w15: U100.8 5130.47,1690 R102.1
NetR103_2: R103.2 U100.2 | length 131.2
  Top Layer w10: R103.2 4750,1639.53 4750,1640 U100.2
OSC32_IN: C17.1 U1.8 X3.4
OSC32_OUT: C18.1 U1.9 X3.1
OSC_IN: C15.1 U1.12 X1.2 | length 170.1
  Top Layer w7: C15.1 5086.3,2020 X1.2 5110.24,1984.25 X1.2@5082.68,2011.81
OSC_OUT: C16.1 U1.13 X1.1 | length 70.9
  Top Layer w7: X1.1@5082.68,1846.46 X1.1@5153.54,1846.46
PH_ENABLE: U1.17 U101.3
RST: C14.2 R1.1 U1.14 | length 42.9
  Top Layer w7: C14.2 R1.1
SD-DET#: CON300.9
SDIO_CK: CON300.5 U1.80
SDIO_CMD: CON300.3 R301.1 U1.83 | length 500
  Top Layer w7: CON300.3 6491.71,2261.97 6500.39,2253.3 6510,2253.3 6640,2123.3 R301.1
SDIO_D0: CON300.8 R304.1 U1.65 | length 224
  Top Layer w7: CON300.8 6484.57,2045.43 6520,2010 R304.1
SDIO_D1: CON300.7 R300.1 U1.66 | length 301.9
  Top Layer w7: CON300.7 6501.26,2088.74 6580,2010 R300.1
SDIO_D2: CON300.1 R303.1 U1.78 | length 821
  Top Layer w7: CON300.1 6512.6,2430 6620,2430 6760,2290 R303.1
SDIO_D3: CON300.2 R302.1 U1.79
SPI2_MISO: U1.53 U500.2
SPI2_MOSI: U1.54 U500.5
SPI2_NSS: R500.1 U1.51 U500.1 | length 98.1
  Top Layer w7: R500.1 6152.68,1550 U500.1
SPI2_SCK: U1.52 U500.6
SPI3_MISO: U1.90
SPI3_MOSI: U1.91
SPI3_SCK: U1.89
STDBY: U1.43 U100.6 | length 40
  Top Layer w7: U100.6 5070,1590
SWCLK: P1.5 U1.76
SWDIO: P1.6 U1.72
TFT_BL: PLEDB.2 PLEDC.2 R401.2 U1.93 | length 363.6
  Top Layer w7: R401.2 4189.53,4410.47 4223,4377 4223,4200 4253.63,4169.37 PLEDC.2
TFT_ENABLE: PLEDB.1 PLEDC.1 U1.92 U400.3 | length 376.8
  Top Layer w7: U400.3 4195.2,4334.8 4210,4320 4210,4180 ; 4210,4090 4210,4180 ; PLEDC.1 4260,4130 4210,4180
U3_RX: P1.2 U1.48
U3_TX: P1.3 U1.47
USB_DM: D200.4 R200.1 U1.71 | length 433.5
  Top Layer w7: R200.1 R200.1@6520.47,1525.07 ; D200.4 6565.2,1214.8 v1(6570,1210)
  Bottom Layer w7: v1(6510,1520) 6590,1520 6610,1500 6610,1343 6570,1303 v1(6570,1210)
USB_DP: D200.6 R201.1 U1.70 | length 502.8
  Top Layer w7: v1(6510,1580) 6520,1570 R201.1 ; v1(6640,1210) D200.6
  Bottom Layer w7: v1(6510,1580) 6520,1570 6610,1570 6640,1540 v1(6640,1210)
USB_ID: R202.1 U1.69
VBAT: BAT.1 C101.2 PLEDB.15 PLEDC.15 R11.1 R105.2 U100.5 U101.1 U102.1 U102.3 U400.1 | length 3676.2
  Top Layer w10: v1@4421.18,4681.18 4494,4754 4546,4754 4618.82,4681.18 PLEDB.15 ; BAT.1 BAT.1@4600,2290 ; U100.5 5090,1540 5220,1410 R11.1
  Top Layer w15: U400.1 4170,3930 v1(4270,3830) ; PLEDC.15 v1@4421.18,4681.18 ; U102.3 4574.8,1645.2 4550,1670 ; U102.1 4580,1720 4550,1750 ; U101.1 4580,1860 4550,1890 ; BAT.1@4600,2290 R105.2 4550,2139.53 4550,1890 ; U100.5 4960,1540 4900,1480 4630,1480 4550,1560 4550,1670 ; 4550,1670 4550,1750 ; 4550,1750 4550,1890
  Bottom Layer w15: v1(4270,3830) 4420,3980 v1(4420,4680)
VBL: LCD2.32 Q400.1 | length 237.3
  Top Layer w10: Q400.1 4120,4673.11 4120,4640 4140,4620 4170,4620 4196,4594 4196,4566 4190,4560 v1@4180,4560
  other v1: 4185,4560
VBUS: C100.2 CON200.1 D200.5 P1.1 R11.2 R102.2 | length 1417.8
  Top Layer w10: R11.2 R102.2 ; D200.5 6602.6,1242.6 6650,1290 6692.56,1290 6768.53,1365.97 CON200.1
  Bottom Layer w15: 5349.53,1530 5370,1530 5440,1460 6380,1460
VDD: C8.1 C9.1 C10.1 C11.1 C19.1 C500.1 KON.1 LCD.1 LCD.15 R1.2 R6.2 R500.2 U1.6 U1.11 U1.19 U1.21 U1.22 U1.28 U1.50 U1.75 U1.100 U102.5 U500.3 U500.7 U500.8 | length 2441.3
  Top Layer w7: U500.8 U500.7 U500.7@6443.15,1500
  Top Layer w10: C9.1 5537.56,1342.44 C9.1@5540,1340 ; C500.1 6135.59,1450 C500.1@6143.15,1450 ; R500.2 6133.15,1460 C500.1@6143.15,1450 ; U500.3 C500.1@6143.15,1450
  Top Layer w15: U102.5 4720,1720 v1(4780,1780) ; v1(4790,1850) 4800,1860 4910,1860 4920,1870 4920,1899.53 R1.2 4919.53,1919.53 ; 5202.44,2070 C11.1 5242.44,2052.44 ; LCD.15 5720.47,4614.17 5755.91,4649.61 6125.98,4649.61 6161.42,4614.17 LCD.1 ; C8.1 C8.1@6180,2210
  Bottom Layer w7: 6110,1640 6220,1750 6390,1750 6410,1730 6410,1690
  Bottom Layer w10: 5520,1560 5580,1500 5970,1500 6110,1640
  Bottom Layer w15: v1(4780,1780) 4780,1840 v1(4790,1850)
VPH: CON300.4 R300.2 R301.2 R302.2 R303.2 R304.2 U101.5 | length 2952
  Top Layer w7: R304.2 R300.2 6610,1830.47 R301.2 R302.2 R303.2
  Top Layer w10: U101.5 v1(4700,1861.58) ; CON300.4 6481.34,2218.66 6610,2090 6610,1830.47 ; v1(6480,1830) 6519.53,1830 R304.2
  Bottom Layer w10: v1(4700,1861.58) 4700,1810 4600,1710 4600,1510 4720,1390 4730,1390 ; 5150,1390 5220,1320 5520,1320 5520,1340 5580,1400 5640,1400 5670,1430 5673.8,1433.8 6239.86,1433.8 6243.65,1430 6337.7,1430 6340,1432.3 ; 6420,1530 6480,1590 v1(6480,1830)
VTFT: LCD2.7 LCD2.8 LCD2.37 Q400.3 R400.2 R402.2 U400.5 | length 1278.2
  Top Layer w10: v1(4050,4260) U400.5 ; v1(4070,4580) 4129.53,4520.47 R400.2@4140,4520.47 ; v1(4160,4720) 4164.29,4715.71 Q400.3
  Bottom Layer w10: v1(4070,4580) 4070,4590 4050,4610 ; LCD2.7 LCD2.8 4089.53,3800.47 4050,3840 v1(4050,4260) 4050,4610 ; LCD2.37 4083.86,4713.86 4050,4680 4050,4610
WKUP: KON.2 U1.23
pads on no net: CON200.6 CON200.7 CON300.0 D200.1 D200.3 LCD2.1 LCD2.2 LCD2.3 LCD2.4 LCD2.5 LCD2.9 LCD2.22 LCD2.23 LCD2.24 LCD2.25 LCD2.26 LCD2.27 LCD2.28 LCD2.29 U1.7 U1.15 U1.16 U1.33 U1.34 U1.36 U1.44 U1.45 U1.46 U1.55 U1.56 U1.57 U1.59 U1.60 U1.63 U1.64 U1.67 U1.68 U1.77 U1.84 U1.87 U101.4 U102.4 U400.4 X3.2 X3.3
copper on no net: | length 164.1
  Bottom Layer w7: 5850,1120 5860,1130 5860,1280
  other v2: 6844.57,2065.12 6844.57,2380.08

## Other copper
Top Layer:
  text "Entry" at 5271.65,1326.77 h62.99
  text "ArithMax" at 4629.92,1204.72 h275.59
  text "Designed by Zweb" at 4629.92,1141.73 h39.37
  text "V3" at 5334.65,1110.24 h118.11

## Silkscreen, mask and mechanical layers (free items; w line width, h text height)
Top Paste:
  text "Entry" at 5271.65,1326.77 h62.99
  text "ArithMax" at 4629.92,1204.72 h275.59
  text "Designed by Zweb" at 4629.92,1141.73 h39.37
  text "V3" at 5334.65,1110.24 h118.11
Top Solder:
  text "Entry" at 5271.65,1326.77 h62.99
  text "ArithMax" at 4629.92,1204.72 h275.59
  text "Designed by Zweb" at 4629.92,1141.73 h39.37
  text "V3" at 5334.65,1110.24 h118.11
Mechanical 1:
  lines w0: 4000,3550 4523.62,3550 4523.62,3520 4523.62,3380 4523.62,1275.59 ccw(c4799.21,1275.59) 4799.21,1000 4877.95,1000 cw(c4996.06,1000) 5114.17,1000 6409.45,1000 cw(c6527.56,1000) 6645.67,1000 6724.41,1000 ccw(c6724.41,1275.59) 7000,1275.59 7000,4779.53 6189.53,4779.53 4000,4779.53 4000,3550